# EAGLE board TEST_Board (EAGLE 9.0.1)
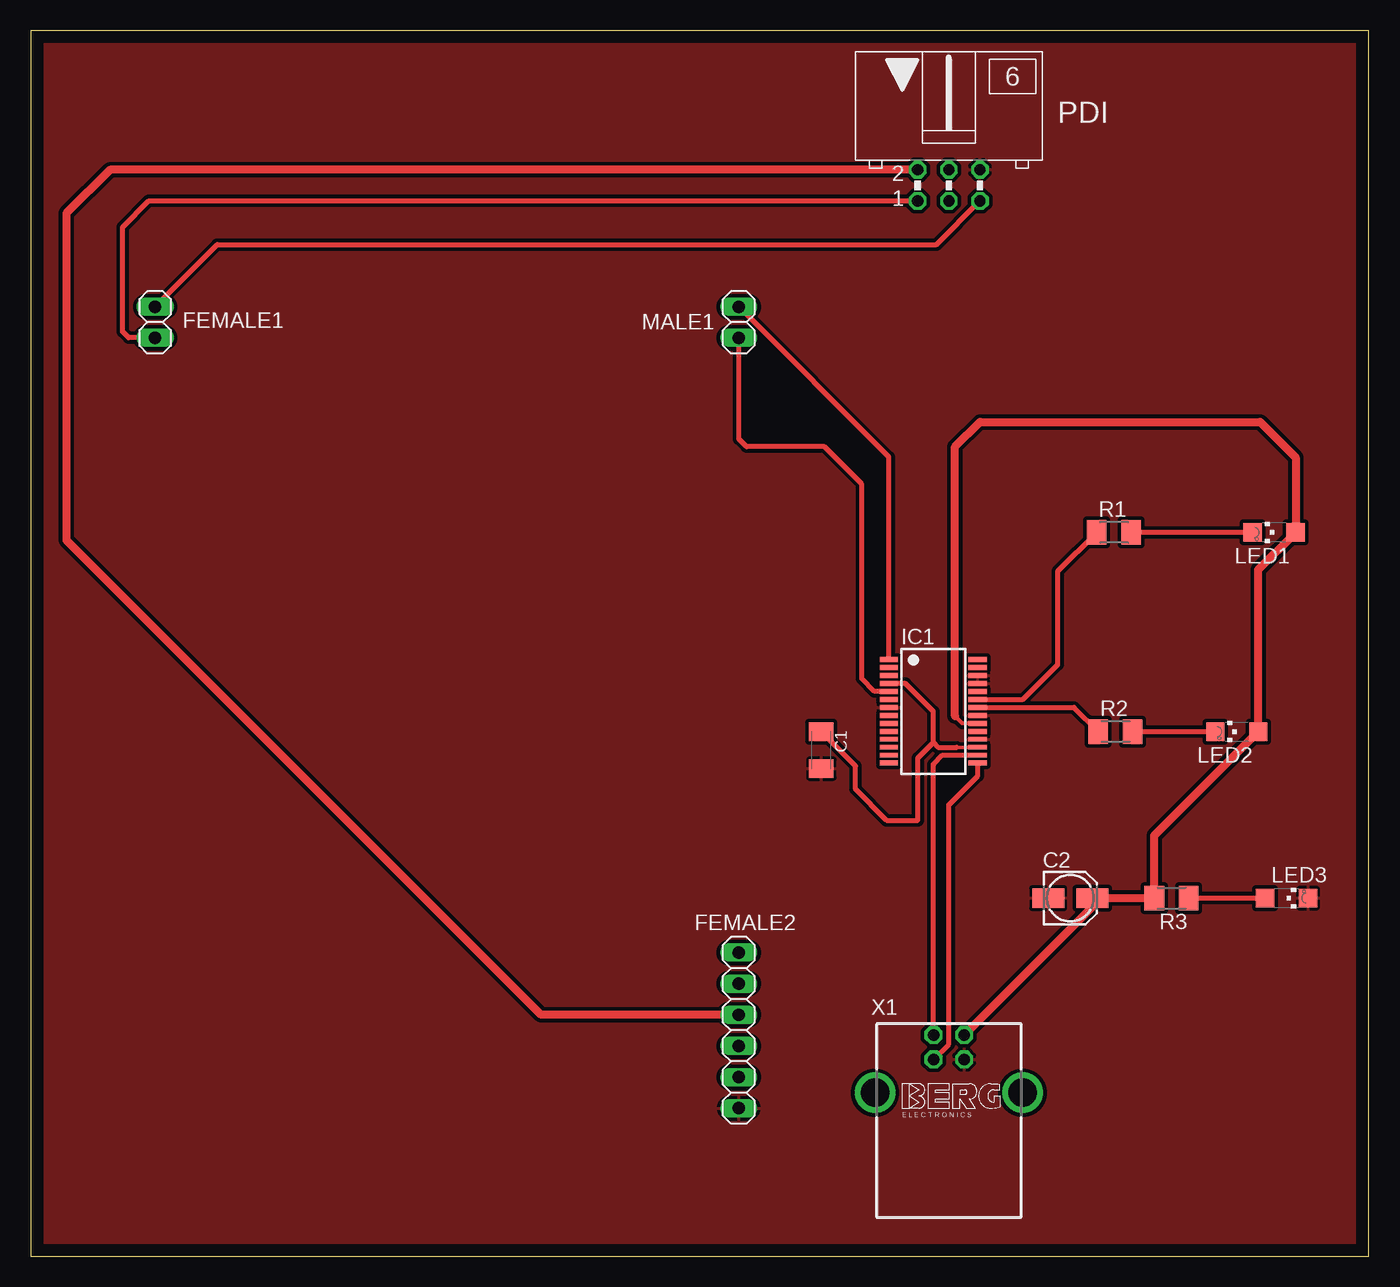
[diagram p0: board, top side]

Size 109.2 x 100 mm. Coordinates in mm from the lower left corner, seen from the top.
Outline: 0,0 109.2,0 109.2,100 0,100 0,0
Copper layers (1*16): Top 0.035mm / dielectric 1.5mm / Bottom 0.035mm
Design rules "default": minimum track width 6mil, minimum drill 0.35mm, track to track 6mil, track to pad 6mil, pad to pad 6mil, via to via 6mil, smd to smd 6mil, copper to edge 40mil, drill to drill 6mil, minimum pad ring 10mil, minimum via ring 8mil, stop-mask expansion 4mil, vias tented up to drill 0mil, thermal gap 10mil
Net classes: 0 default: width 0.406 mm; 1 Power: width 0.635 mm, clearance 0.305 mm to class 0, clearance 0.305 mm

## Footprints (pad centres in the part's own frame; a part is rotated, then mirrored left to right if it is on the bottom)
C1206K = smd 1.5 x 2: 1 -1.5,0; 2 1.5,0
153CLV-0405 = smd 2.6 x 1.6: + 1.8,0; - -1.8,0
1X02 = drill 1.016 long: 1 -1.27,0; 2 1.27,0
1X06 = drill 1.016 long: 1 -6.35,0; 2 -3.81,0; 3 -1.27,0; 4 1.27,0; 5 3.81,0; 6 6.35,0
SSOP28 = smd 0.4 x 1.5: 1 -4.225,-3.625; 2 -3.575,-3.625; 3 -2.925,-3.625; 4 -2.275,-3.625; 5 -1.625,-3.625; 6 -0.975,-3.625; 7 -0.325,-3.625; 8 0.325,-3.625; 9 0.975,-3.625; 10 1.625,-3.625; 11 2.275,-3.625; 12 2.925,-3.625; 13 3.575,-3.625; 14 4.225,-3.625; 15 4.225,3.625; 16 3.575,3.625; 17 2.925,3.625; 18 2.275,3.625; 19 1.625,3.625; 20 0.975,3.625; 21 0.325,3.625; 22 -0.325,3.625; 23 -0.975,3.625; 24 -1.625,3.625; 25 -2.275,3.625; 26 -2.925,3.625; 27 -3.575,3.625; 28 -4.225,3.625
CHIPLED_1206 = smd 1.5 x 1.5: A 0,-1.75; C 0,1.75
ML6L = drill 0.914 octagon: 1 -2.54,-1.27; 2 -2.54,1.27; 3 0,-1.27; 4 0,1.27; 5 2.54,-1.27; 6 2.54,1.27
M1206 = smd 1.6 x 2: 1 -1.4,0; 2 1.4,0
PN61729-S = drill 0.95 octagon: 1 1.25,4.71; 2 -1.25,4.71; 3 -1.25,2.71; 4 1.25,2.71 | drill 2.3 pad 2.9: S1 -6.02,0; S2 6.02,0

## Placement (x,y rotation side)
C1  0.1uF  [C1206K]  64.52,41.27 270 top
C2  [153CLV-0405]  84.84,29.21 0 top
FEMALE1  [1X02]  10.16,76.2 270 top
FEMALE2  [1X06]  57.78,18.41 270 top
IC1  FT232RL  [SSOP28]  73.66,44.45 270 top
LED1  [CHIPLED_1206]  101.47,59.05 90 top
LED2  [CHIPLED_1206]  98.42,42.8 90 top
LED3  USBPower  [CHIPLED_1206]  102.49,29.21 270 top
MALE1  [1X02]  57.78,76.2 270 top
PDI  [ML6L]  74.93,87.38 0 top
R1  330E  [M1206]  88.39,59.05 0 top
R2  330E  [M1206]  88.52,42.8 0 top
R3  330E  [M1206]  93.09,29.21 180 top
X1  PN61729-S  [PN61729-S]  74.93,13.34 0 top

## Library data of the parts
C1 C2 = rcl; SPICEPREFIX: C
FEMALE1 FEMALE2 MALE1 = pinhead
IC1 = ftdichip; MPN: FT232RL; OC_FARNELL: 1146032; OC_NEWARK: 91K9918
LED1-LED3 = led
PDI = con-ml; OC_FARNELL: unknown; OC_NEWARK: unknown
R1-R3 = rcl; SPICEPREFIX: R
X1 = con-berg; OC_FARNELL: unknown; OC_NEWARK: unknown

## Nets
3V3OUT1: C1.1 IC1.4 IC1.17
+3.3V [Power]: FEMALE2.3 PDI.2
+5V [Power]: C2.+ IC1.20 LED1.A LED2.A R3.2 X1.1
GND [Power]: C1.2 C2.- FEMALE2.6 IC1.7 IC1.18 IC1.21 IC1.25 IC1.26 LED3.C PDI.6 X1.4
MISO: FEMALE1.1 PDI.5
N$1: LED3.A R3.1
N$2: IC1.23 R1.1
N$3: IC1.22 R2.1
N$4: LED2.C R2.2
N$5: LED1.C R1.2
RST: FEMALE1.2 PDI.1
RX1: IC1.5 MALE1.2
TX1: IC1.1 MALE1.1
USBDM1: IC1.16 X1.2
USBDP1: IC1.15 X1.3

## Tracks (layer width: path | path; a pad name or v marks a point on that pad's centre or on a via)
3V3OUT1
  Top 0.279: 75.56,41.52 IC1.17
  Top 0.406: IC1.4 71.39,46.73 73.66,44.45 73.66,41.91 | 73.66,41.91 74.05,41.52 75.56,41.52 | 73.66,41.91 72.39,40.64 72.39,35.56 69.85,35.56 67.31,38.1 67.31,39.98 C1.1
+3.3V
  Top 0.635: FEMALE2.3 41.66,19.68 2.92,58.42 2.92,85.09 6.48,88.65 PDI.2
+5V
  Top 0.33: IC1.20 76.03,43.48 75.44,44.07
  Top 0.635: X1.1 86.64,28.5 C2.+ R3.2 91.69,34.31 LED2.A 100.17,56.01 LED1.A 103.22,65.18 100.33,68.07 77.47,68.07 75.44,66.04 75.44,44.07
GND
  pour Top: -1.27,-1.27 110.49,-1.27 110.49,101.6 -1.27,101.6
MISO
  Top 0.406: FEMALE1.1 15.24,82.55 73.91,82.55 PDI.5
N$1
  Top 0.406: R3.1 LED3.A
N$2
  Top 0.406: IC1.23 80.98,45.42 83.82,48.26 83.82,55.88 R1.1
N$3
  Top 0.406: IC1.22 85.14,44.77 R2.1
N$4
  Top 0.406: R2.2 LED2.C
N$5
  Top 0.406: LED1.C R1.2
RST
  Top 0.406: FEMALE1.2 8,74.93 7.49,75.44 7.49,83.95 9.65,86.11 PDI.1
RX1
  Top 0.406: MALE1.2 57.78,66.67 58.42,66.04 64.77,66.04 67.82,62.99 67.82,47.12 68.86,46.08 IC1.5
TX1
  Top 0.406: IC1.1 70.03,65.22 MALE1.1
USBDM1
  Top 0.406: IC1.16 74.4,40.88 73.66,40.13 73.68,40.11 X1.2
USBDP1
  Top 0.406: X1.3 74.93,17.3 74.93,36.83 77.28,39.19 IC1.15